# EAGLE board max6_breakout_pan (EAGLE 6.1)
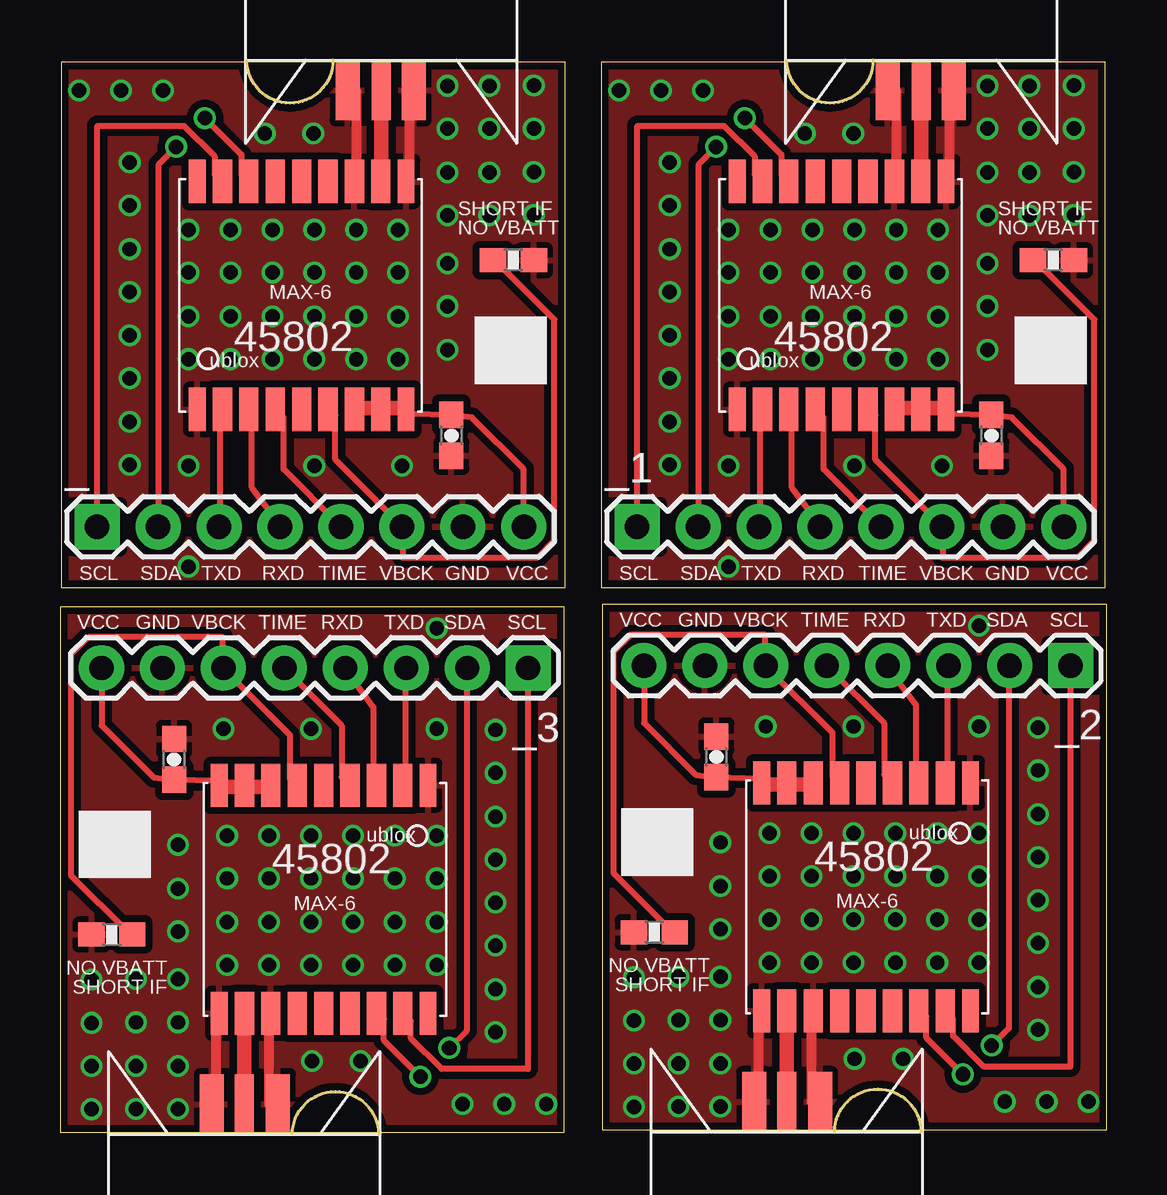
[diagram p0: board, top side]
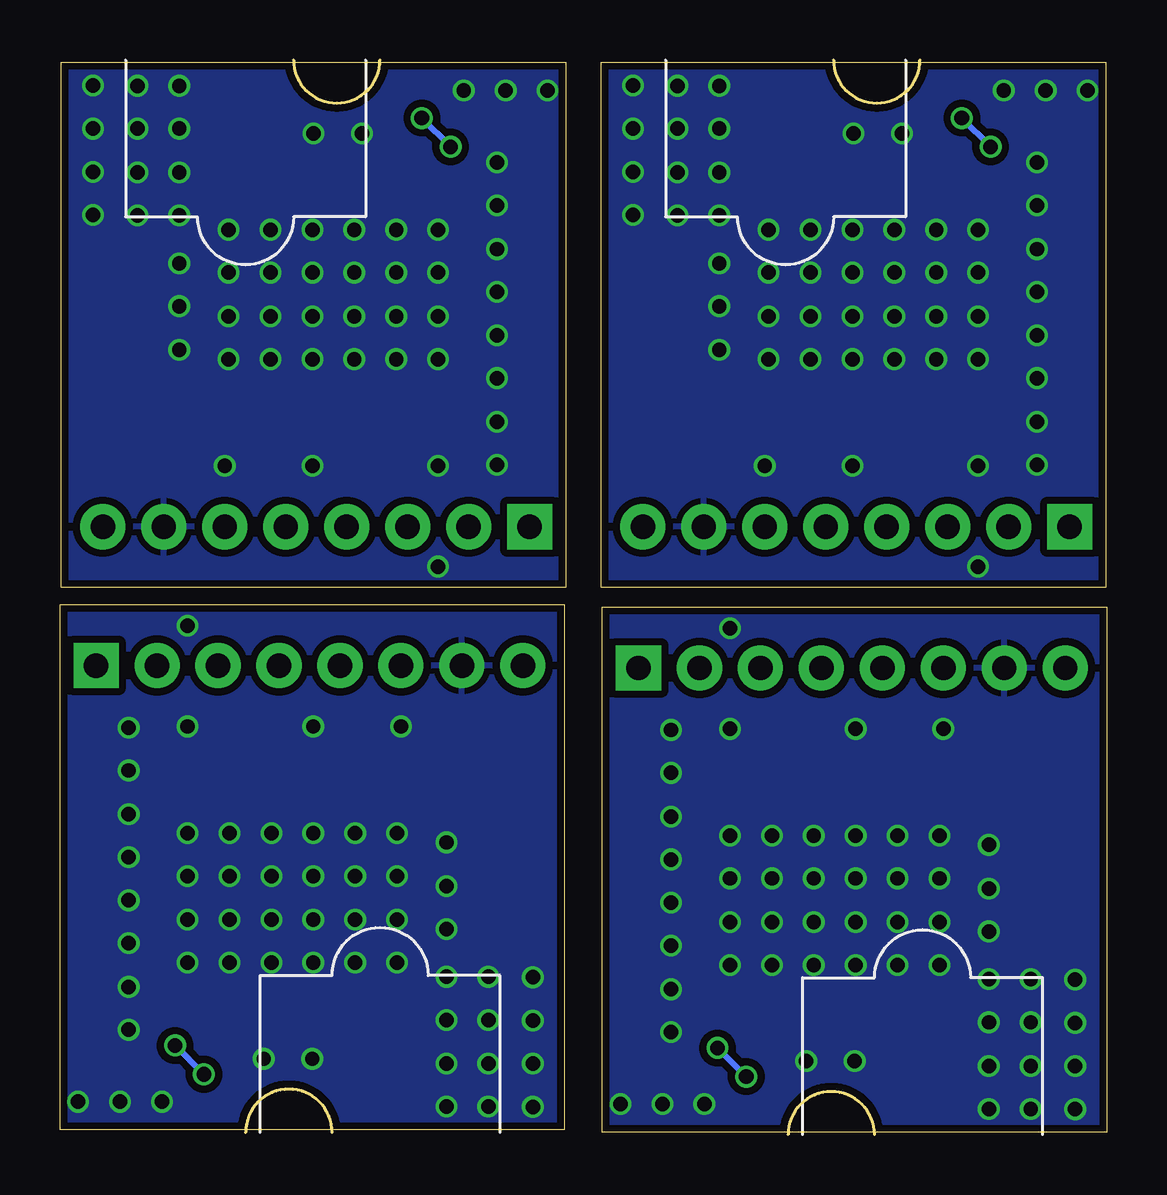
[diagram p1: board, bottom side, seen from below]

Size 43.61 x 44.6 mm. Coordinates in mm from the lower left corner, seen from the top.
Outline: 0.04,22.7 21.06,22.7 21.06,44.6 0.04,44.6 0.04,22.7
Outline: 22.54,22.7 43.56,22.7 43.56,44.6 22.54,44.6 22.54,22.7
Outline: 43.61,22 22.6,22 22.6,0.1 43.61,0.1 43.61,22
Outline: 21.01,21.9 0,21.9 0,0 21.01,0 21.01,21.9
Copper layers (1*16): Top 0.035mm / dielectric 1.5mm / Bottom 0.035mm
Design rules: minimum track width 6mil, minimum drill 12mil, track to track 6mil, track to pad 6mil, pad to pad 6mil, via to via 6mil, smd to smd 0mil, copper to edge 10mil, drill to drill 10mil, minimum pad ring 10mil, minimum via ring 6mil, stop-mask expansion 2mil, vias tented up to drill 100mil, thermal gap 10mil

## Footprints (pad centres in the part's own frame; a part is rotated, then mirrored left to right if it is on the bottom)
1X08 = drill 1.016 pad 1.88 square: 1 0,0 | drill 1.016 pad 1.88: 2 2.54,0; 3 5.08,0; 4 7.62,0; 5 10.16,0; 6 12.7,0; 7 15.24,0; 8 17.78,0
0603-CAP = smd 1.1 x 1: 1 -0.85,0; 2 0.85,0
0603-RES = smd 1.1 x 1: 1 -0.85,0; 2 0.85,0
UBLOX_MAX-6 = smd 1.8 x 0.7: 1_GND 4.95,-4.4; 9_V_RESET 4.95,4.3; 10_GND -4.55,4.3; 18_RESERVED -4.55,-4.4 | smd 1.8 x 0.8: 2_TXD1 4.95,-3.35; 3_RXD1 4.95,-2.25; 4_TIMEPULSE 4.95,-1.15; 5_EXTINT0 4.95,-0.05; 6_V_BCKP 4.95,1.05; 7_VCC_IO 4.95,2.15; 8_VCC 4.95,3.25; 11_RF_IN -4.55,3.25; 12_GND -4.55,2.15; 13_ANTON -4.55,1.05; 14_VCC_RF -4.55,-0.05; 15_RESERVED -4.55,-1.15; 16_SDA2 -4.55,-2.25; 17_SCL2 -4.55,-3.35
SARANTEL-SR1202 = smd 2.5 x 0.8: FEED 0,0 | smd 2.5 x 1: GND1 0,1.4; GND2 0,-1.35

## Placement (x,y rotation side)
_  [1X08]  1.55,25.24 0 top
_1  [1X08]  24.05,25.24 0 top
_2  [1X08]  42.11,19.46 180 top
_3  [1X08]  19.51,19.36 180 top
C1  100nF  [0603-CAP]  16.31,29.05 270 top
C2  100nF  [0603-CAP]  38.81,29.05 270 top
C3  100nF  [0603-CAP]  27.35,15.65 90 top
C4  100nF  [0603-CAP]  4.75,15.55 90 top
R1  0  [0603-RES]  18.89,36.36 0 top
R2  0  [0603-RES]  41.39,36.36 0 top
R3  0  [0603-RES]  24.76,8.35 180 top
R4  0  [0603-RES]  2.16,8.25 180 top
U$1  UBLOX_MAX-6  [UBLOX_MAX-6]  10.12,35.09 270 top
U$2  SARANTEL-SR1202  [SARANTEL-SR1202]  13.38,43.43 90 top
U$3  UBLOX_MAX-6  [UBLOX_MAX-6]  32.62,35.09 270 top
U$4  SARANTEL-SR1202  [SARANTEL-SR1202]  35.88,43.43 90 top
U$5  UBLOX_MAX-6  [UBLOX_MAX-6]  33.54,9.62 90 top
U$6  SARANTEL-SR1202  [SARANTEL-SR1202]  30.28,1.27 270 top
U$7  UBLOX_MAX-6  [UBLOX_MAX-6]  10.94,9.52 90 top
U$8  SARANTEL-SR1202  [SARANTEL-SR1202]  7.68,1.17 270 top

## Library data of the parts
_ _1-_3 C1-C4 R1-R4 = SparkFun
U$1-U$8 = ava

## Nets
GND: _.7 C1.2 R1.2 U$1.1_GND U$1.10_GND U$1.12_GND U$2.GND1 U$2.GND2
GND1: _1.7 C2.2 R2.2 U$3.1_GND U$3.10_GND U$3.12_GND U$4.GND1 U$4.GND2
GND2: _2.7 C3.2 R3.2 U$5.1_GND U$5.10_GND U$5.12_GND U$6.GND1 U$6.GND2
GND3: _3.7 C4.2 R4.2 U$7.1_GND U$7.10_GND U$7.12_GND U$8.GND1 U$8.GND2
N$1: U$3.11_RF_IN U$4.FEED
N$2: U$1.11_RF_IN U$2.FEED
N$3: U$5.11_RF_IN U$6.FEED
N$4: U$7.11_RF_IN U$8.FEED
RXD1: _.4 U$1.3_RXD1
RXD2: _1.4 U$3.3_RXD1
RXD3: _2.4 U$5.3_RXD1
RXD4: _3.4 U$7.3_RXD1
SCL1: _1.1 U$3.17_SCL2
SCL2: _.1 U$1.17_SCL2
SCL3: _2.1 U$5.17_SCL2
SCL4: _3.1 U$7.17_SCL2
SDA1: _1.2 U$3.16_SDA2
SDA2: _.2 U$1.16_SDA2
SDA3: _2.2 U$5.16_SDA2
SDA4: _3.2 U$7.16_SDA2
TIMEPULSE: _.5 U$1.4_TIMEPULSE
TIMEPULSE1: _1.5 U$3.4_TIMEPULSE
TIMEPULSE2: _2.5 U$5.4_TIMEPULSE
TIMEPULSE3: _3.5 U$7.4_TIMEPULSE
TXD1: _.3 U$1.2_TXD1
TXD2: _1.3 U$3.2_TXD1
TXD3: _2.3 U$5.2_TXD1
TXD4: _3.3 U$7.2_TXD1
V_BCKP: _.6 R1.1 U$1.6_V_BCKP
V_BCKP1: _1.6 R2.1 U$3.6_V_BCKP
V_BCKP2: _2.6 R3.1 U$5.6_V_BCKP
V_BCKP3: _3.6 R4.1 U$7.6_V_BCKP
VCC: _.8 C1.1 U$1.7_VCC_IO U$1.8_VCC U$1.9_V_RESET
VCC1: _1.8 C2.1 U$3.7_VCC_IO U$3.8_VCC U$3.9_V_RESET
VCC2: _2.8 C3.1 U$5.7_VCC_IO U$5.8_VCC U$5.9_V_RESET
VCC3: _3.8 C4.1 U$7.7_VCC_IO U$7.8_VCC U$7.9_V_RESET

## Tracks (layer width: path | path; a pad name or v marks a point on that pad's centre or on a via)
GND  (via drill 0.6)
  Top 0.406: U$1.10_GND 14.56,39.32 14.56,43.43 U$2.GND2 | U$2.GND1 12.34,43.43 12.34,39.53
  other vias: 14.25,27.78 10.56,41.64 8.53,41.64 5.36,37.62 5.36,32.23 5.36,35.84 5.36,34.02 7.1,37.62 7.1,35.84 7.1,34.02 7.1,32.23 8.85,32.23 8.85,34.02 8.85,35.84 8.85,37.62 10.6,37.62 10.6,35.84 10.6,34.02 10.6,32.23 12.34,32.23 12.34,34.02 12.34,35.84 12.34,37.62 14.09,37.62 14.09,35.84 14.09,34.02 14.09,32.23 10.6,27.78 5.36,27.78 2.9,40.42 2.9,38.64 2.9,36.81 2.9,35.03 2.9,33.23 2.9,31.44 2.9,29.62 2.9,27.83 16.14,40.02 16.14,41.84 16.14,43.62 17.89,43.62 17.89,41.84 17.89,40.02 19.74,41.84 19.74,43.64 19.74,40.04 16.14,32.62 16.14,34.44 16.14,36.23 16.14,38.22 17.89,38.22 19.74,38.24 0.8,43.42 2.54,43.42 4.29,43.42 5.36,23.58
  pour Bottom (isolate 0.305): -0.36,44.61 21.55,44.61 21.55,22.7 -0.36,22.7
  pour Top (isolate 0.305): -0.36,44.61 21.55,44.61 21.55,22.7 -0.36,22.7
GND1  (via drill 0.6)
  Top 0.406: U$3.10_GND 37.07,39.32 37.07,43.43 U$4.GND2 | U$4.GND1 34.84,43.43 34.84,39.53
  other vias: 36.75,27.78 33.06,41.64 31.03,41.64 27.86,37.62 27.86,32.23 27.86,35.84 27.86,34.02 29.6,37.62 29.6,35.84 29.6,34.02 29.6,32.23 31.35,32.23 31.35,34.02 31.35,35.84 31.35,37.62 33.1,37.62 33.1,35.84 33.1,34.02 33.1,32.23 34.84,32.23 34.84,34.02 34.84,35.84 34.84,37.62 36.59,37.62 36.59,35.84 36.59,34.02 36.59,32.23 33.1,27.78 27.86,27.78 25.4,40.42 25.4,38.64 25.4,36.81 25.4,35.03 25.4,33.23 25.4,31.44 25.4,29.62 25.4,27.83 38.64,40.02 38.64,41.84 38.64,43.62 40.39,43.62 40.39,41.84 40.39,40.02 42.24,41.84 42.24,43.64 42.24,40.04 38.64,32.62 38.64,34.44 38.64,36.23 38.64,38.22 40.39,38.22 42.24,38.24 23.3,43.42 25.04,43.42 26.79,43.42 27.86,23.58
  pour Bottom (isolate 0.305): 22.14,44.61 44.05,44.61 44.05,22.7 22.14,22.7
  pour Top (isolate 0.305): 22.14,44.61 44.05,44.61 44.05,22.7 22.14,22.7
GND2  (via drill 0.6)
  Top 0.406: U$5.10_GND 29.09,5.38 29.09,1.27 U$6.GND2 | U$6.GND1 31.31,1.27 31.31,5.17
  other vias: 29.41,16.92 33.1,3.07 35.12,3.07 38.3,7.08 38.3,12.47 38.3,8.86 38.3,10.69 36.55,7.08 36.55,8.86 36.55,10.69 36.55,12.47 34.81,12.47 34.81,10.69 34.81,8.86 34.81,7.08 33.06,7.08 33.06,8.86 33.06,10.69 33.06,12.47 31.31,12.47 31.31,10.69 31.31,8.86 31.31,7.08 29.57,7.08 29.57,8.86 29.57,10.69 29.57,12.47 33.06,16.92 38.3,16.92 40.75,4.28 40.75,6.06 40.75,7.89 40.75,9.67 40.75,11.48 40.75,13.26 40.75,15.09 40.75,16.87 27.51,4.69 27.51,2.86 27.51,1.08 25.77,1.08 25.77,2.86 25.77,4.69 23.91,2.86 23.91,1.06 23.91,4.66 27.51,12.09 27.51,10.26 27.51,8.48 27.51,6.48 25.77,6.48 23.91,6.46 42.86,1.28 41.11,1.28 39.37,1.28 38.3,21.12
  pour Bottom (isolate 0.305): 44.01,0.09 22.11,0.09 22.11,22 44.01,22
  pour Top (isolate 0.305): 44.01,0.09 22.11,0.09 22.11,22 44.01,22
GND3  (via drill 0.6)
  Top 0.406: U$7.10_GND 6.49,5.28 6.49,1.17 U$8.GND2 | U$8.GND1 8.71,1.17 8.71,5.07
  other vias: 6.81,16.82 10.5,2.97 12.52,2.97 15.7,6.98 15.7,12.37 15.7,8.76 15.7,10.59 13.95,6.98 13.95,8.76 13.95,10.59 13.95,12.37 12.21,12.37 12.21,10.59 12.21,8.76 12.21,6.98 10.46,6.98 10.46,8.76 10.46,10.59 10.46,12.37 8.71,12.37 8.71,10.59 8.71,8.76 8.71,6.98 6.97,6.98 6.97,8.76 6.97,10.59 6.97,12.37 10.46,16.82 15.7,16.82 18.15,4.18 18.15,5.96 18.15,7.79 18.15,9.57 18.15,11.38 18.15,13.16 18.15,14.98 18.15,16.77 4.91,4.59 4.91,2.76 4.91,0.98 3.17,0.98 3.17,2.76 3.17,4.59 1.31,2.76 1.31,0.96 1.31,4.56 4.91,11.98 4.91,10.16 4.91,8.38 4.91,6.39 3.17,6.39 1.31,6.36 20.26,1.18 18.51,1.18 16.77,1.18 15.7,21.02
  pour Bottom (isolate 0.305): 21.41,-0.01 -0.49,-0.01 -0.49,21.9 21.41,21.9
  pour Top (isolate 0.305): 21.41,-0.01 -0.49,-0.01 -0.49,21.9 21.41,21.9
N$1
  Top 0.406: U$3.11_RF_IN 35.88,39.32
  Top 0.61: 35.88,39.32 U$4.FEED
N$2
  Top 0.406: U$1.11_RF_IN 13.38,39.32
  Top 0.61: 13.38,39.32 U$2.FEED
N$3
  Top 0.406: U$5.11_RF_IN 30.27,5.38
  Top 0.61: 30.27,5.38 U$6.FEED
N$4
  Top 0.406: U$7.11_RF_IN 7.67,5.28
  Top 0.61: 7.67,5.28 U$8.FEED
RXD1
  Top 0.254: U$1.3_RXD1 7.88,30.12 8,30 8,26.88 9.16,25.32 _.4
RXD2
  Top 0.254: U$3.3_RXD1 30.38,30.12 30.5,30 30.5,26.88 31.66,25.32 _1.4
RXD3
  Top 0.254: U$5.3_RXD1 35.66,14.7 35.66,17.82 34.5,19.38 _2.4
RXD4
  Top 0.254: U$7.3_RXD1 13.06,14.6 13.06,17.72 11.9,19.28 _3.4
SCL1
  Top 0.254: U$3.17_SCL2 28.94,39.96 28.94,40.68 27.66,41.96 24.06,41.96 24.06,25.32 _1.1
SCL2
  Top 0.254: U$1.17_SCL2 6.44,39.96 6.44,40.68 5.16,41.96 1.56,41.96 1.56,25.32 _.1
SCL3
  Top 0.254: U$5.17_SCL2 37.22,4.74 37.22,4.02 38.5,2.74 42.1,2.74 42.1,19.38 _2.1
SCL4
  Top 0.254: U$7.17_SCL2 14.62,4.64 14.62,3.92 15.9,2.64 19.5,2.64 19.5,19.28 _3.1
SDA1  (via drill 0.61)
  Top 0.254: v28.54,42.28 30.06,40.76 30.06,39.88 30.3,39.64 U$3.16_SDA2 | v27.34,41.08 26.62,40.36 26.62,25.32 _1.2
  Bottom 0.254: v27.34,41.08 v28.54,42.28
SDA2  (via drill 0.61)
  Top 0.254: v6.04,42.28 7.56,40.76 7.56,39.88 7.8,39.64 U$1.16_SDA2 | v4.84,41.08 4.12,40.36 4.12,25.32 _.2
  Bottom 0.254: v4.84,41.08 v6.04,42.28
SDA3  (via drill 0.61)
  Top 0.254: v37.62,2.42 36.1,3.94 36.1,4.82 35.86,5.06 U$5.16_SDA2 | v38.82,3.62 39.54,4.34 39.54,19.38 _2.2
  Bottom 0.254: v38.82,3.62 v37.62,2.42
SDA4  (via drill 0.61)
  Top 0.254: v15.02,2.32 13.5,3.84 13.5,4.72 13.26,4.96 U$7.16_SDA2 | v16.22,3.52 16.94,4.24 16.94,19.28 _3.2
  Bottom 0.254: v16.22,3.52 v15.02,2.32
TIMEPULSE
  Top 0.254: U$1.4_TIMEPULSE 9,30.12 9.32,29.8 9.32,27.64 11.64,25.32 _.5
TIMEPULSE1
  Top 0.254: U$3.4_TIMEPULSE 31.5,30.12 31.82,29.8 31.82,27.64 34.14,25.32 _1.5
TIMEPULSE2
  Top 0.254: U$5.4_TIMEPULSE 34.66,14.58 34.34,14.9 34.34,17.06 32.02,19.38 _2.5
TIMEPULSE3
  Top 0.254: U$7.4_TIMEPULSE 12.06,14.48 11.74,14.8 11.74,16.96 9.42,19.28 _3.5
TXD1
  Top 0.254: U$1.2_TXD1 6.76,30.12 6.68,30.04 6.68,25.32 _.3
TXD2
  Top 0.254: U$3.2_TXD1 29.26,30.12 29.18,30.04 29.18,25.32 _1.3
TXD3
  Top 0.254: U$5.2_TXD1 36.98,14.66 36.98,19.38 _2.3
TXD4
  Top 0.254: U$7.2_TXD1 14.38,14.56 14.38,19.28 _3.3
V_BCKP
  Top 0.254: R1.1 18.2,36.28 20.6,33.88 20.6,24.68 19.88,23.96 14.28,23.96 14.28,25.24 _.6 14.2,25.32 11.48,28.04 11.48,29.88 11.24,30.12 U$1.6_V_BCKP
V_BCKP1
  Top 0.254: R2.1 40.7,36.28 43.1,33.88 43.1,24.68 42.38,23.96 36.78,23.96 36.78,25.24 _1.6 36.7,25.32 33.98,28.04 33.98,29.88 33.74,30.12 U$3.6_V_BCKP
V_BCKP2
  Top 0.254: R3.1 25.46,8.42 23.06,10.82 23.06,20.02 23.78,20.74 29.38,20.74 29.38,19.46 _2.6 29.46,19.38 32.18,16.66 32.18,14.82 32.42,14.58 U$5.6_V_BCKP
V_BCKP3
  Top 0.254: R4.1 2.86,8.32 0.46,10.72 0.46,19.92 1.18,20.64 6.78,20.64 6.78,19.36 _3.6 6.86,19.28 9.58,16.56 9.58,14.72 9.82,14.48 U$7.6_V_BCKP
VCC
  Top 0.254: 12.28,30.2 U$1.7_VCC_IO | 13.32,30.2 U$1.8_VCC 13.48,30.2 | 14.36,30.2 U$1.9_V_RESET 14.44,30.12 14.44,29.96 16.38,29.92 C1.1 17.16,29.8 19.32,27.64 19.32,25.32 _.8
  Top 0.61: 13.32,30.2 12.28,30.2 | 14.36,30.2 13.48,30.2
VCC1
  Top 0.254: 34.78,30.2 U$3.7_VCC_IO | 35.82,30.2 U$3.8_VCC 35.98,30.2 | 36.86,30.2 U$3.9_V_RESET 36.94,30.12 36.94,29.96 38.88,29.92 C2.1 39.66,29.8 41.82,27.64 41.82,25.32 _1.8
  Top 0.61: 35.82,30.2 34.78,30.2 | 36.86,30.2 35.98,30.2
VCC2
  Top 0.254: 31.38,14.5 U$5.7_VCC_IO | 30.34,14.5 U$5.8_VCC 30.18,14.5 | 29.3,14.5 U$5.9_V_RESET 29.22,14.58 29.22,14.74 27.28,14.78 C3.1 26.5,14.9 24.34,17.06 24.34,19.38 _2.8
  Top 0.61: 30.34,14.5 31.38,14.5 | 29.3,14.5 30.18,14.5
VCC3
  Top 0.254: 8.78,14.4 U$7.7_VCC_IO | 7.74,14.4 U$7.8_VCC 7.58,14.4 | 6.7,14.4 U$7.9_V_RESET 6.62,14.48 6.62,14.64 4.68,14.68 C4.1 3.9,14.8 1.74,16.96 1.74,19.28 _3.8
  Top 0.61: 7.74,14.4 8.78,14.4 | 6.7,14.4 7.58,14.4

## Text on the board
tNames: SHORT IF | SHORT IF | NO VBATT | NO VBATT | 45802 | 45802 | SCL | SDA | TXD | RXD | TIME | VBCK | GND | VCC | SCL | SDA | TXD | RXD | TIME | VBCK | GND | VCC | VCC | GND | VBCK | TIME | RXD | TXD | SDA | SCL | VCC | GND | VBCK | TIME | RXD | TXD | SDA | SCL | 45802 | 45802 | NO VBATT | NO VBATT | SHORT IF | SHORT IF